# Altium PCB servo_light_pcb.PcbDoc
Units mm, origin at the board's own origin, x right, y up, seen from the top; angles counter-clockwise.
Board outline 56.39 x 39.46 mm, 2 copper layers (Top Layer, Bottom Layer); 11 components, 9 nets, 85 pads, 7 vias.
Unrouted connection lines stored in the file: 25.
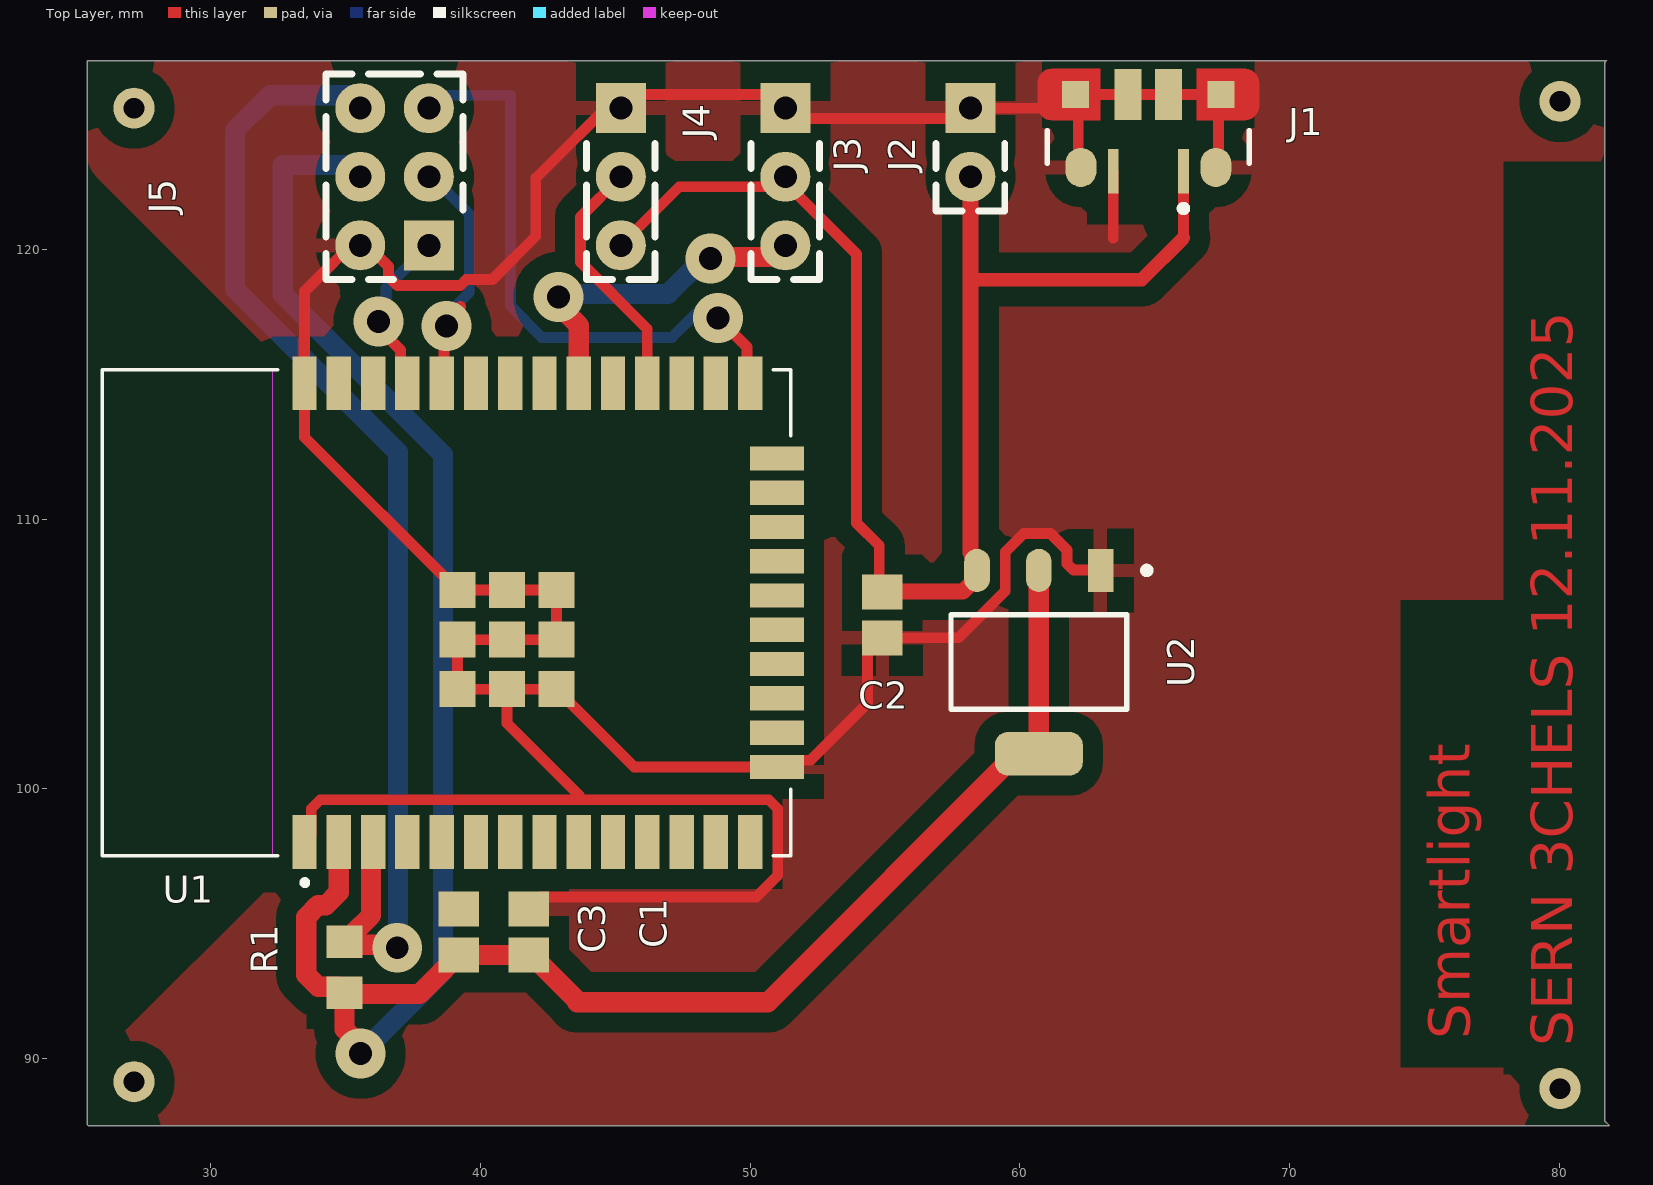
[diagram p0: Top Layer view]
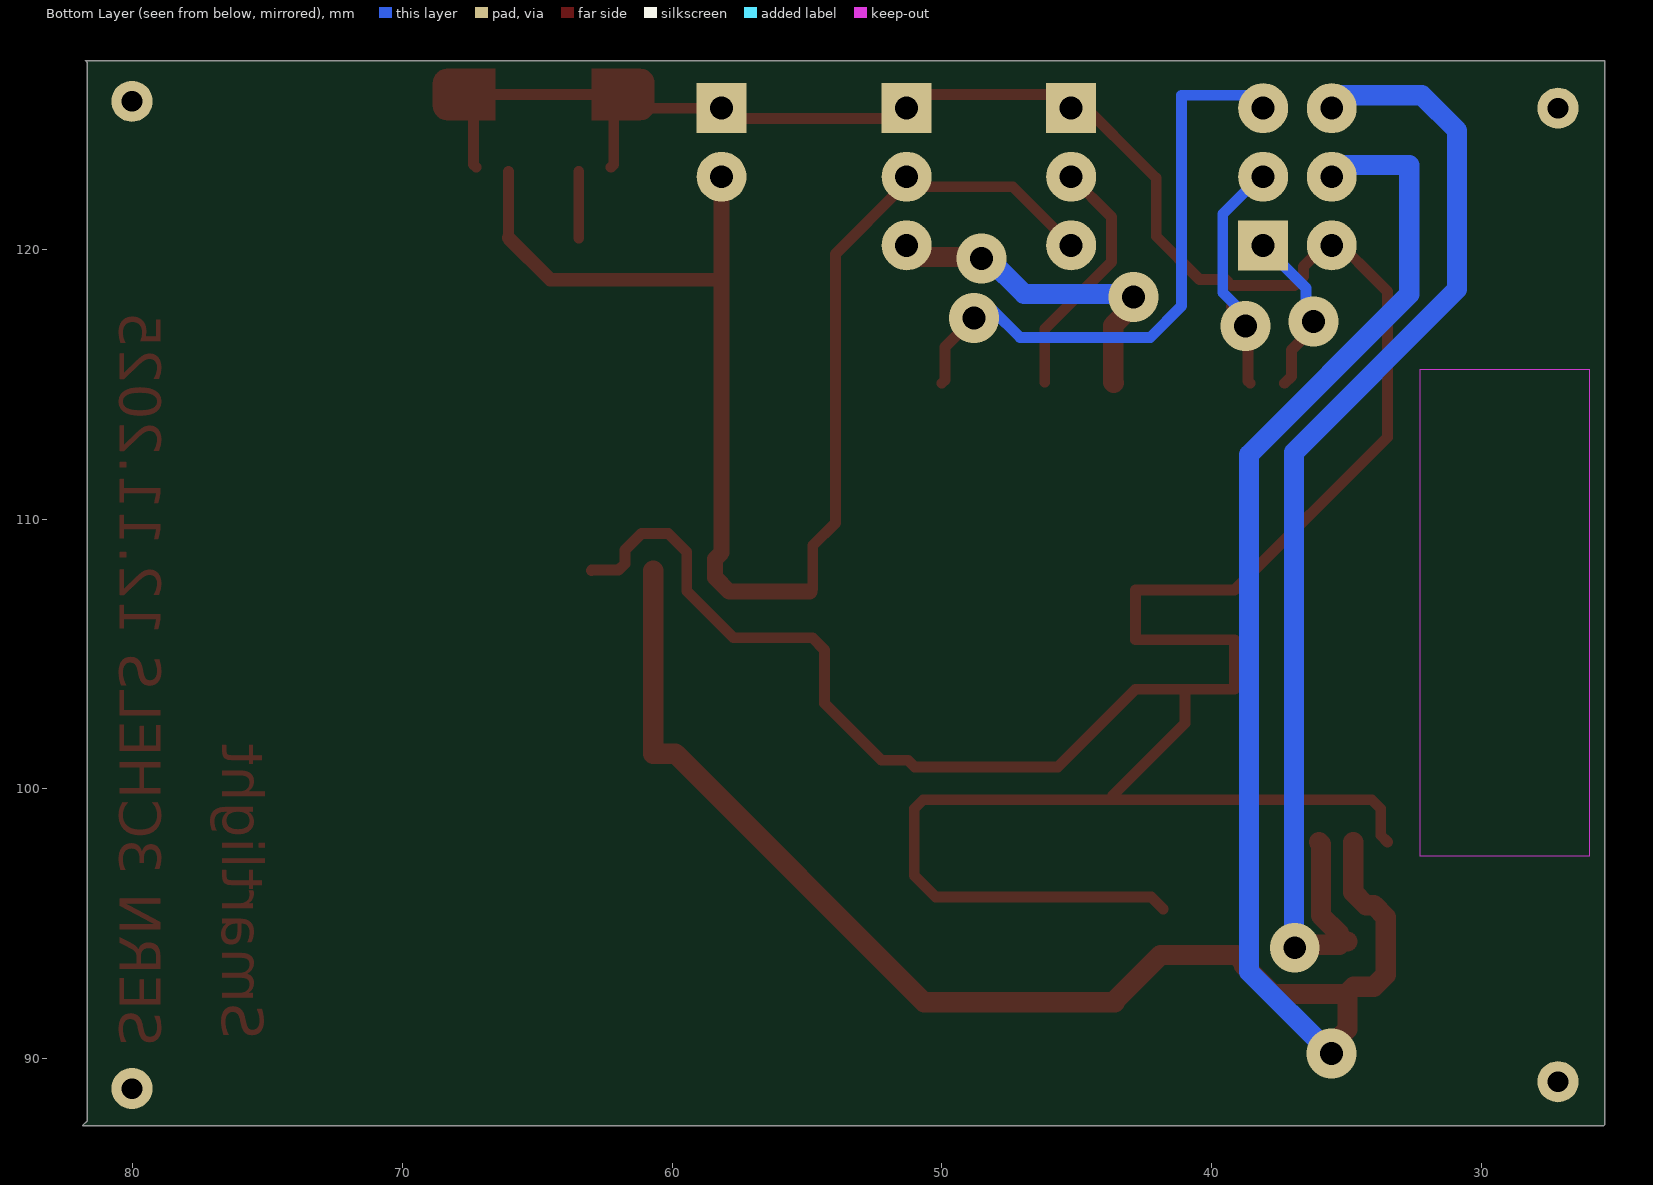
[diagram p1: Bottom Layer view, seen from below]

## Layer stack, top to bottom
Top Solder: solder mask 0.0102, Solder Resist, Dk 3.5
Top Layer: signal copper 0.0356
Dielectric 1: dielectric 0.32, FR-4, Dk 4.8
Bottom Layer: signal copper 0.0356
Bottom Solder: solder mask 0.0102, Solder Resist, Dk 3.5

## Board outline
25.476,87.528 25.451,87.554 25.451,126.984 81.737,126.984 81.661,126.908 81.661,87.706 81.839,87.528

## Design rules (kind name [scope] priority, off if disabled: settings)
Clearance [All] p1: gap=0.75 ignorepadtopadclearanceinfootprint=FALSE except(0.37: Arc-Arc Arc-Track Arc-SMDPad Arc-THPad Arc-Via Arc-Text Arc-Hole Track-Track Track-SMDPad Track-THPad Track-Via Track-Text Track-Hole SMDPad-SMDPad SMDPad-THPad SMDPad-Via SMDPad-Text SMDPad-Hole THPad-THPad THPad-Via THPad-Text THPad-Hole Via-Via Via-Text Via-Hole Text-Text Text-Hole)
HoleSize [All] p1: absolutevalues=TRUE maxlimit=4.1 minlimit=0.75 maxpercent=80.000 minpercent=20.000
MinimumAnnularRing [All] p1: minimumring=0.5
PolygonConnect [All] p1: connectstyle=Relief reliefconductorwidth=0.5 reliefentries=4 polygonreliefangle="90 Angle" airgapwidth=0.75
RoutingVias [All] p1: holewidth=0.85 width=1.85 viastyle="Through Hole" minholewidth=0.75 minwidth=1.75 maxholewidth=0.95 maxwidth=1.95
SolderMaskExpansion [All] p1: expansion=0.102 istentingtop=FALSE
SupplyNets "Schematic Supply Nets_2" [InNet('5V')] p1: voltage=0.000
SupplyNets "Schematic Supply Nets_1" [InNet('GND')] p2: voltage=0.000
SupplyNets "Schematic Supply Nets" [InNet('3.3V')] p3: voltage=0.000
Width [All] p1: maxlimit=1 minlimit=0.4 preferedwidth=0.75
29 further rules are at their usual default settings.

## Components (designator, comment, footprint, x,y, rotation, side; value= is the part's Value field where it differs from the comment)
C1 "Cap Ceramic" 0805C 41.8,94.7 r270 top
C2 "Cap Ceramic" 0805C 54.9,106.45 r90 top
C3 "Cap Ceramic" 0805C 39.2,94.7 r270 top
J1 "USB-Micro" "USB-MICRO-B_V - RZEP_CN" 64.758,124.38 r180 top
J2 "CON2" SIP-2 58.166,123.952 r270 top
J3 "Servo" Sip-3 51.308,122.682 r270 top
J4 "CON3" Sip-3 45.212,122.682 r270 top
J5 "CON2x3" PFOSTEN_2x3 36.83,122.682 r90 top
R1 "Resistor" 0805R 34.976,93.396 r90 top
U1 "ESP32-WROOM-32" MODULE_ESP32-WROOM-32 38.756,106.531 r90 top
U2 "AMS1117" FP-ams1117-IPC_A 60.7,104.7 r270 top

## Footprints (in the part's own frame and the unit in brackets; to place one, negate y for a bottom-side part, rotate by r counter-clockwise, add the part's x,y. Pads: shape width x height; smd on the part's side, far side on the other; paste and mask are expansions set on the pad)
0805C [mm] "Chip Capasitor, Body 2x1.25mm, IPC Density Medium"
  rect 1.3x1.5 smd: 1(-0.85,0) 2(0.85,0)
  body extent -1.1,-0.72 1.1,0.72, height 0.94
0805R [mm] "Chip Resistor, 2-Leads, Body 2.0x1.3mm, IPC Medium Density"
  rect 1.2x1.35 smd: 1(-0.95,0) 2(0.95,0)
  body extent -1.1,-0.67 1.1,0.67, height 0.6
FP-ams1117-IPC_A [mm]
  rect 1.604x0.952 smd paste+0 mask+0: 1(-3.395,2.29)
  rrect100% 1.604x0.952 smd paste+0 mask+0: 2(-3.395,0) 3(-3.395,-2.29)
  rrect59% 1.604x3.262 smd paste+0 mask+0: 4(3.395,0)
  silkscreen extent -3.52,-3.25 1.75,4.13, body extent -4.7,-3.75 4.7,3.75, height 0.25
MODULE_ESP32-WROOM-32 [mm]
  rect 2x0.9 smd: 1(-8.5,5.26) 2(-8.5,3.99) 3(-8.5,2.72) 4(-8.5,1.45) 5(-8.5,0.18) 6(-8.5,-1.09) 7(-8.5,-2.36) 8(-8.5,-3.63) 9(-8.5,-4.9) 10(-8.5,-6.17) 11(-8.5,-7.44) 12(-8.5,-8.71) 13(-8.5,-9.98) 14(-8.5,-11.25) 25(8.5,-11.25) 26(8.5,-9.98) 27(8.5,-8.71) 28(8.5,-7.44) 29(8.5,-6.17) 30(8.5,-4.9) 31(8.5,-3.63) 32(8.5,-2.36) 33(8.5,-1.09) 34(8.5,0.18) 35(8.5,1.45) 36(8.5,2.72) 37(8.5,3.99) 38(8.5,5.26)
  rect 0.9x2 smd: 15(-5.715,-12.25) 16(-4.445,-12.25) 17(-3.175,-12.25) 18(-1.905,-12.25) 19(-0.635,-12.25) 20(0.635,-12.25) 21(1.905,-12.25) 22(3.175,-12.25) 23(4.445,-12.25) 24(5.715,-12.25)
  rect 1.33x1.33 smd: 39(-2.835,-2.24) 39(-2.835,-0.405) 39(-2.835,-4.075) 39(-1,-0.405) 39(-1,-4.075) 39(-1,-2.24) 39(0.835,-0.405) 39(0.835,-4.075) 39(0.835,-2.24)
  Keep-Out Layer region: 9,6.45 -9,6.45 -9,12.75 9,12.75
  Keep-Out Layer region: 9,6.45 -9,6.45 -9,12.75 9,12.75
  silkscreen extent -10.1,-12.75 9,12.75, body extent -9,-12.75 9,12.75, height 3.2
PFOSTEN_2x3 [mm]
  rect 1.85x1.85 hole 0.85 mask+0.102: 1(-2.54,-1.27)
  round 1.85 hole 0.85 mask+0.102: 2(-2.54,1.27) 3(0,-1.27) 4(0,1.27) 5(2.54,-1.27) 6(2.54,1.27)
  silkscreen extent -3.81,-2.54 3.81,2.54
SIP-2 [mm]
  rect 1.85x1.85 hole 0.85: 1(-1.27,0)
  round 1.85 hole 0.85: 2(1.27,0)
  silkscreen extent 0.04,-1.27 2.54,1.27
Sip-3 [mm]
  rect 1.85x1.85 hole 0.85: 1(-2.54,0)
  round 1.85 hole 0.85: 2(0,0) 3(2.54,0)
  silkscreen extent -1.23,-1.27 3.81,1.27
"USB-MICRO-B_V - RZEP_CN" [mm] "USB, MICRO B, Body 7.491x4.695 mm, Pitch 0.65 mm"
  rect 0.4x1.65 smd: 1(-1.3,1.5) 5(1.3,1.5)
  oval 1.15x1.45 smd: 6(-2.5,1.35) 7(2.5,1.35)
  rect 1x1 smd: 8(-2.7,-1.35) 11(2.7,-1.35)
  rect 1x1.9 smd: 9(-0.75,-1.35) 10(0.75,-1.35)
  Top Layer circle w0.5: c-3.6,-1.8 r0.25
  Top Layer circle w0.5: c-3.6,-0.9 r0.25
  Top Layer circle w0.5: c3.6,-1.8 r0.25
  Top Layer circle w0.5: c3.6,-0.9 r0.25
  Top Layer region: -1.8,-2.3 -1.8,-0.4 -3.6,-0.4 -3.6,-2.3
  Top Layer region: -3.6,-1.8 -3.6,-0.9 -4.1,-0.9 -4.1,-1.8
  Top Layer region: 1.775,-0.4 1.775,-2.3 3.6,-2.3 3.6,-0.4
  Top Layer region: 3.6,-0.9 3.6,-1.8 4.1,-1.8 4.1,-0.9
  silkscreen extent -3.75,-0.01 3.75,3, body extent -4.1,-3.9 4.1,1.5, height 2.67

## Part data
C1 C2 C3: "Kondensator"
J1: library part USB_CMP-2000-05610-1, "Right Angle Female Type AB Micro USB Connector, 30 V, 1.8 A, -30 to 85 degC, RoHS, Tape and Reel", Color=Black, Current Rating=1.8A, Manufacturer=Molex, Operating Temperature Range=-20Cto+85C, Package Description="Micro USB Connector, Pitch 0.65 mm, 5 Positions, Body 7.5 x 5.6 mm", Package Reference=47589-0001, Voltage Rating=30VAC, Brand=Molex, Connector Type=MicroUSBTypeABreceptacle, Contact Material=CopperAlloy, Contact Plating=Gold, Datasheet URL=http://www.molex.com/webdocs/datasheets/pdf/en-us/0475890001_IO_CONNECTORS.pdf, Datasheet Version=12/2016, Gender=Female, Manufacturer URL=http://www.molex.com/, Mounting Angle=Right, Mounting Technology=SurfaceMount, Number of Contacts=5Contact, Number of Ports=1Port, Package URL=http://www.molex.com/pdm_docs/sd/475890001_sd.pdf, Packaging=Reel, Product=MicroUSBTypeABConnectors, Product Category=USBConnectors, RoHS=True, Series=47589, Standard=USB, Termination Style=SMD/SMT
J2 J3 J4 J5: "Stecker"
R1: "Widerstand"
U1: "Bluetooth, WiFi 802.11b/g/n, Bluetooth v4.2 +EDR, Class 1, 2 and 3 Transceiver Module 2.4GHz ~ 2.5GHz Antenna Not Included, U.FL Surface Mount", Package="Module Espressif Systems", Availability="In Stock", Check_prices=https://www.snapeda.com/parts/ESP32-WROOM-32/Espressif+Systems/view-part/?ref=eda, MF="Espressif Systems", MP=ESP32-WROOM-32, Price=None, Purchase-URL=https://pricing.snapeda.com/search/part/ESP32-WROOM-32/?ref=eda, SnapEDA_Link=https://www.snapeda.com/parts/ESP32-WROOM-32/Espressif+Systems/view-part/?ref=snap

## Free pads (board coordinates)
  round 1.524 hole 0.762: 1(80.01,125.476) 2(27.178,125.222) 3(27.178,89.154) 4(80.01,88.9)

## Via types
v1: diameter 1.85, hole 0.85, Top Layer to Bottom Layer, 7 vias

## Nets (pads, with @x,y where several pads share a name; then routed paths per layer and width w, separated by ;. In a path a pad name is that pad's centre, name@x,y a point inside that pad or via, vN(x,y) a via of type N, cw(c..) or ccw(c..) an arc to the next point about the centre after c; other vN are vias at no path point)
3.3V: C1.2 C3.2 J5.4 R1.1 U1.2 U2.2 U2.4 | length 87.2
  Top Layer w0.75: U1.2 34.766,96.166 34.291,95.691 33.992,95.691 33.556,95.254 33.556,93.11 33.995,92.671 34.751,92.671 R1.1 34.976,91.093 35.576,90.493 v1(35.576,90.196) ; R1.1@34.976,92.4 37.75,92.4 38.825,93.475 38.825,93.575 39.1,93.85 C1.2 41.9,93.85 43.6,92.15 43.6,92.1 50.666,92.1 59.871,101.305 U2.4 U2.2
  Bottom Layer w0.75: v1@35.6,90.2 38.625,93.225 38.625,112.386 32.69,118.322 32.69,123.114 35.636,123.114 J5.4@35.687,123.165
5V: C2.2 J1.1 J2.2 J3.2 J4.3 U2.3 | length 53.2
  Top Layer w0.4: J4.3 47.381,122.311 J3.2@51.389,122.311 ; J3.2@51.4,122.3 51.472,122.3 53.95,119.822 53.95,109.855 54.789,109.016 54.789,107.411 C2.2@54.889,107.311 ; 66.058,120.414 J1.1
  Top Layer w0.5: 58.166,118.872 64.516,118.872 66.058,120.414
  Top Layer w0.6: C2.2@54.911,107.311 57.882,107.311 58.41,107.839 58.41,108.516 58.166,108.76 58.166,118.872 J2.2
EN: J5.6 R1.2 U1.3 | length 43.9
  Top Layer w0.75: R1.2 R1.2@35.051,94.346 ; R1.2@35.075,94.35 35.3,94.575 35.3,94.65 35.961,95.311 35.961,97.956 U1.3 ; R1.2@35.276,94.231 36.816,94.231 v1(36.931,94.116)
  Bottom Layer w0.75: J5.6@35.687,125.705 32.225,125.705 30.918,124.397 30.918,118.509 36.955,112.472 v1@36.955,94.12
GND: C1.1 C2.1 J1.5 J1.6 J1.7 J1.8 J1.9 J1.10 J1.11 J2.1 J3.1 J4.1 J5.2 U1.1 U1.15 U1.38 U1.39 U2.1 | length 140.9
  Top Layer w0.4: U1.1 33.746,98.281 33.746,99.267 34.079,99.601 50.692,99.601 51.026,99.267 51.026,96.795 50.231,96 42.25,96 C1.1 ; J5.2 35.814,120.142 36.605,119.351 36.605,118.981 36.939,118.647 39.261,118.647 39.486,118.872 40.455,118.872 42.061,120.478 42.061,122.63 45.161,125.73 50.51,125.73 51.4,124.84 J2.1@58.216,124.84 ; J5.2@35.687,120.509 35.687,120.625 33.496,118.433 U1.38 33.496,113.031 39.161,107.366 40.996,107.366 42.831,107.366 42.831,105.531 40.996,105.531 39.161,105.531 39.161,103.696 U1.39@40.996,103.696 ; 43.661,99.766 40.996,102.431 U1.39@40.996,103.696 ; J2.1 61.55,125.222 J1.11 ; J1.7 62.158,123.13 62.158,125.63 J1.11 ; U2.1 62.977,108.108 61.98,108.108 61.746,108.342 61.746,108.854 61.133,109.467 60.14,109.467 59.456,108.783 59.456,107.336 57.72,105.6 C2.1 54.8,105.6 54.35,105.15 54.35,103.174 52.242,101.066 51.256,101.066 U1.15 45.711,100.816 42.831,103.696 U1.39@40.996,103.696 ; 63.458,120.414 J1.5 ; J1.6 67.358,123.13 67.358,125.63 J1.8 J1.9 J1.10 J1.11
Infarot: J4.2 U1.28 | length 9.3
  Top Layer w0.4: J4.2 43.717,121.187 43.717,119.523 46.196,117.044 U1.28@46.196,115.07
Io0: J5.5 U1.25 | length 22.3
  Top Layer w0.4: v1(48.807,117.456) 49.886,116.377 49.886,115.151 U1.25
  Bottom Layer w0.4: J5.5@38.227,125.705 41.123,125.705 41.123,117.889 42.286,116.725 47.104,116.725 48.108,117.729 48.534,117.729 v1(48.807,117.456)
Rx: J5.3 U1.34 | length 9.9
  Top Layer w0.4: U1.34 38.662,115.117 38.662,116.761 v1@38.9,117 ; v1(38.748,117.152) v1@38.9,117 ; v1@39.268,117.877 38.9,117.509 v1@38.9,117
  Bottom Layer w0.4: J5.3@38.504,122.887 38.504,122.394 39.595,121.303 39.595,118.392 38.748,117.544 v1(38.748,117.152)
Servo: J3.3 U1.30 | length 12.6
  Top Layer w0.75: v1(42.905,118.22) 42.905,117.923 43.656,117.172 43.656,115.062 U1.30@43.64,115.046 ; v1(48.539,119.659) 48.59,119.71 51.35,119.71 J3.3@51.4,119.76
  Bottom Layer w0.75: v1(42.905,118.22) 43.023,118.339 46.961,118.339 48.282,119.659 v1(48.539,119.659)
Tx: J5.1 U1.35 | length 6.9
  Top Layer w0.4: v1(36.239,117.326) 36.239,117.083 37.056,116.267 37.056,115.281 U1.35
  Bottom Layer w0.4: v1(36.239,117.326) 36.517,117.603 36.517,118.559 38.227,120.269 J5.1@38.227,120.625
pads on no net: C3.1 U1.4 U1.5 U1.6 U1.7 U1.8 U1.9 U1.10 U1.11 U1.12 U1.13 U1.14 U1.16 U1.17 U1.18 U1.19 U1.20 U1.21 U1.22 U1.23 U1.24 U1.26 U1.27 U1.29 U1.31 U1.32 U1.33 U1.36 U1.37

## Polygon pours and split planes (outlines as drawn)
GND on Top Layer "GND_L01_P000" (solid, remove dead copper, pour order 0): 81.661,126.975 81.661,87.528 25.451,87.528 25.451,126.975 25.451,87.528 25.451,126.975

## Other copper
Top Layer:
  pour cut-out: 62.484,120.904 65.786,120.904 65.786,124.714 62.484,124.714
  pour cut-out: 33.062,113.281 49.256,113.281 49.256,99.781 33.062,99.781
  pour cut-out: 25.502,122.86 25.603,122.86 32.842,115.621 32.817,115.595 32.817,97.003 25.273,89.459 25.273,122.58 25.603,122.911
  text "Smartlight" at 76.662,90.724 h1.52 r90
  text "SERN 3CHELS 12.11.2025" at 80.472,90.47 h1.52 r90

## Silkscreen, mask and mechanical layers (free items; w line width, h text height)
Kontur:
  lines w0.254: 25.45,87.525 81.625,87.525 81.65,87.55 81.65,126.95 81.625,126.975 25.45,126.975 25.45,87.525
Drill Drawing:
  circle w0.254: c98.188,128.148 r0.701
  lines w0.254: 97.487,124.292 98.889,124.292 98.889,125.694 97.487,125.694 97.487,124.292
  lines w0.381: 96.215,123.345 219.372,123.345 ; 96.215,129.655 219.372,129.655 ; 104.326,120.19 104.326,132.81 ; 111.006,120.19 111.006,132.81 ; 119.705,120.19 119.705,132.81 ; 125.995,120.19 125.995,132.81 ; 135.148,120.19 135.148,132.81 ; 152.479,120.19 152.479,132.81 ; 159.981,120.19 159.981,132.81 ; 169.781,120.19 169.781,132.81 ; 178.391,120.19 178.391,132.81 ; 188.233,120.19 188.233,132.81 ; 203.535,120.19 203.535,132.81 ; 96.215,120.19 219.372,120.19 219.372,132.81 96.215,132.81 96.215,120.19
  text "Symbol" at 98.108,130.602 h1.83
  text "Count" at 105.272,130.602 h1.83
  text "Hole Size" at 111.953,130.602 h1.83
  text "Plated" at 120.652,130.602 h1.83
  text "Hole Type" at 126.941,130.602 h1.83
  text "Drill Layer Pair" at 136.094,130.602 h1.83
  text "Via/Pad" at 153.426,130.602 h1.83
  text "Pad Shape" at 160.927,130.602 h1.83
  text "Template" at 170.728,130.602 h1.83
  text "Description" at 179.337,130.602 h1.83
  text "Hole Tolerance (+)" at 189.18,130.602 h1.83
  text "Hole Tolerance (-)" at 204.482,130.602 h1.83
  text "4" at 105.272,127.447 h1.52
  text "0,76mm" at 111.953,127.447 h1.52
  text "PTH" at 120.652,127.447 h1.52
  text "Round" at 126.941,127.447 h1.52
  text "Top Layer - Bottom Layer" at 136.094,127.447 h1.52
  text "Pad" at 153.426,127.447 h1.52
  text "Rounded" at 160.927,127.447 h1.52
  text "c152h76" at 170.728,127.447 h1.52
  text "21" at 105.272,124.292 h1.52
  text "0,85mm" at 111.953,124.292 h1.52
  text "PTH" at 120.652,124.292 h1.52
  text "Round" at 126.941,124.292 h1.52
  text "Top Layer - Bottom Layer" at 136.094,124.292 h1.52
  text "(Mixed)" at 153.426,124.292 h1.52
  text "(Mixed)" at 160.927,124.292 h1.52
  text "(Mixed)" at 170.728,124.292 h1.52
  text "25 Total" at 105.272,121.137 h1.52

## Text inside footprints (layer, text, board x,y; h text height)
J1: Mechanical 1 "PCB EDGE" at 71.958,127.28 h0.3 r180
U1: Top 3D Body "ANTENNA" at 29.756,100.531 h1.78 r90